# Altium PCB CollisionDetection.PcbDoc
Units mil, origin at the board's own origin, x right, y up, seen from the top; angles counter-clockwise.
Board outline 6000 x 4000 mil, 2 copper layers (Top Layer, Bottom Layer); 16 components, 27 nets, 85 pads, 5 vias.
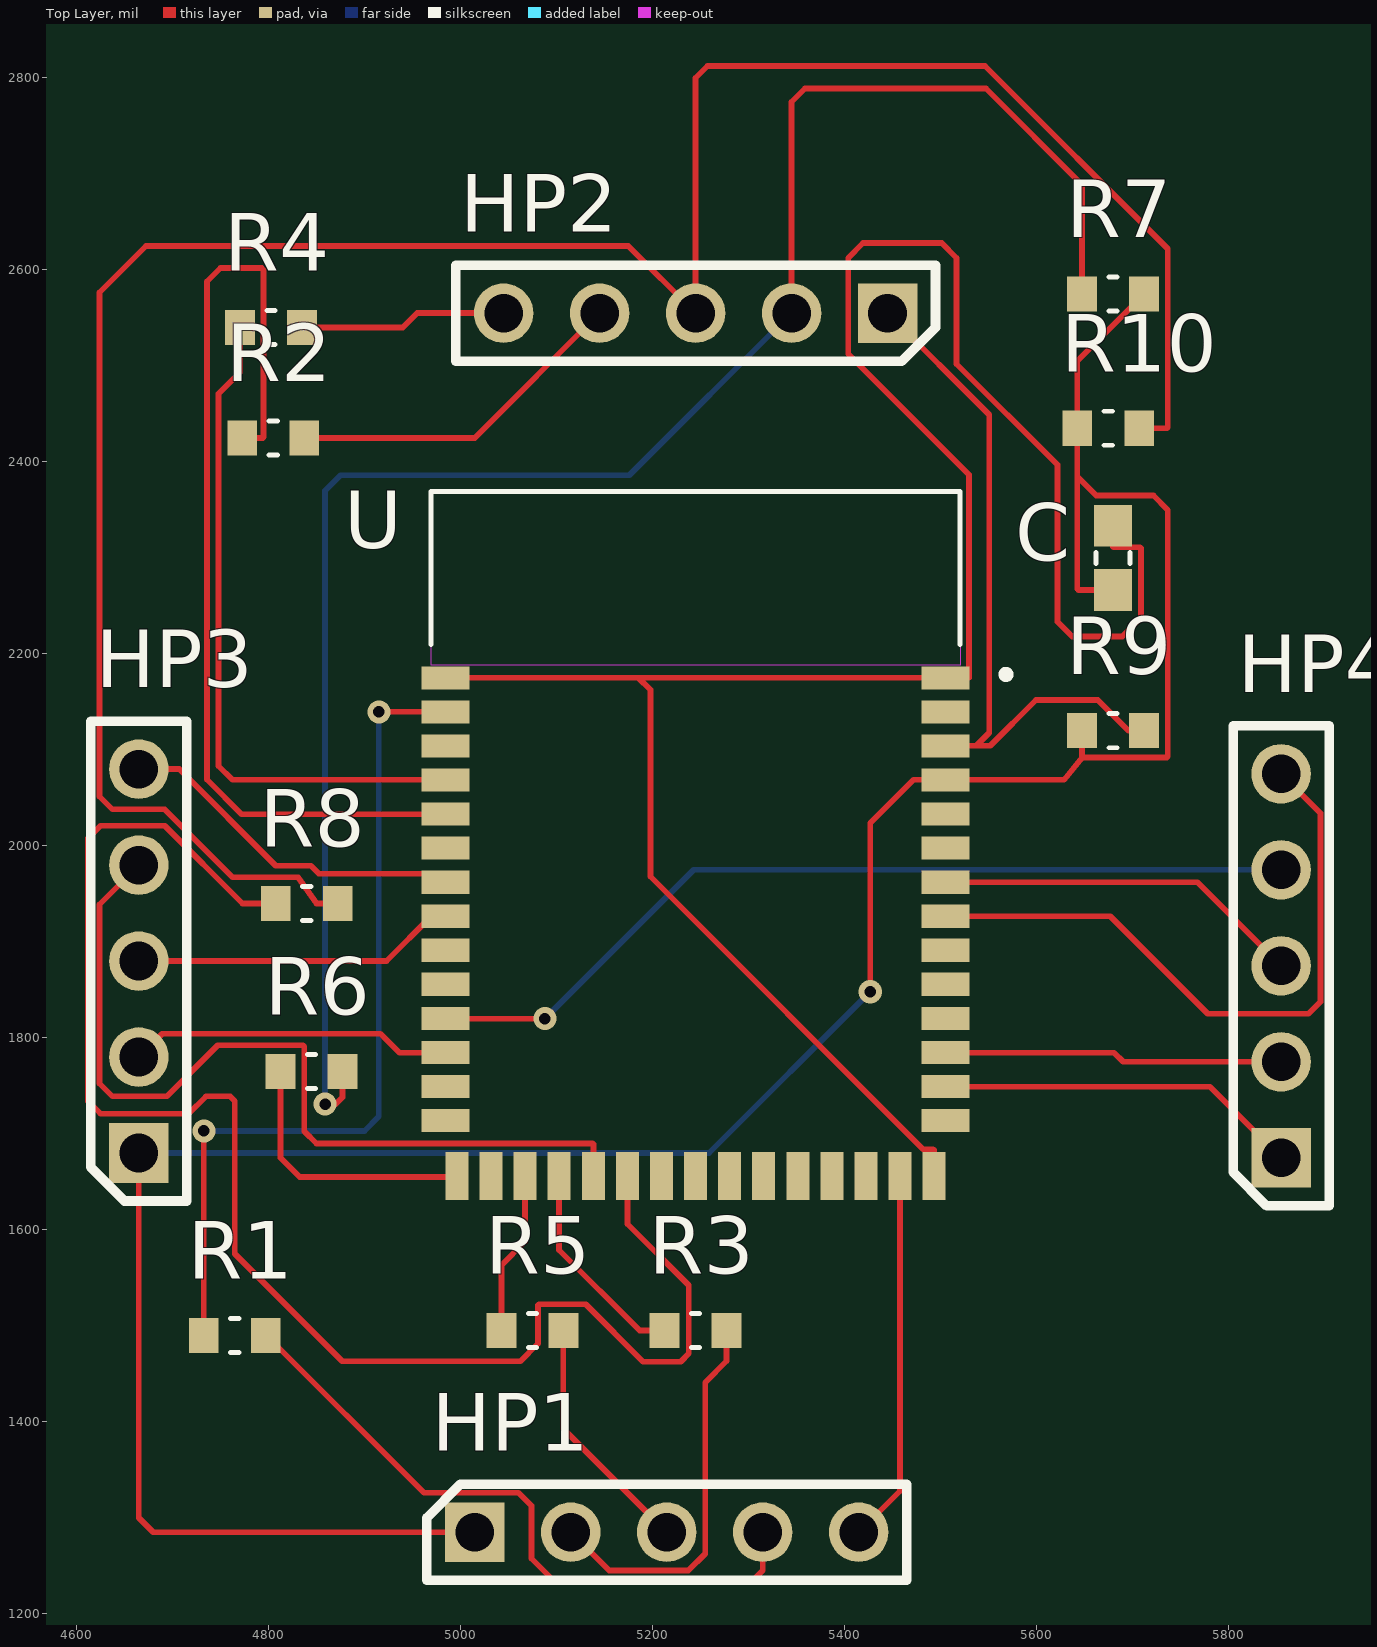
[diagram p0: Top Layer view]
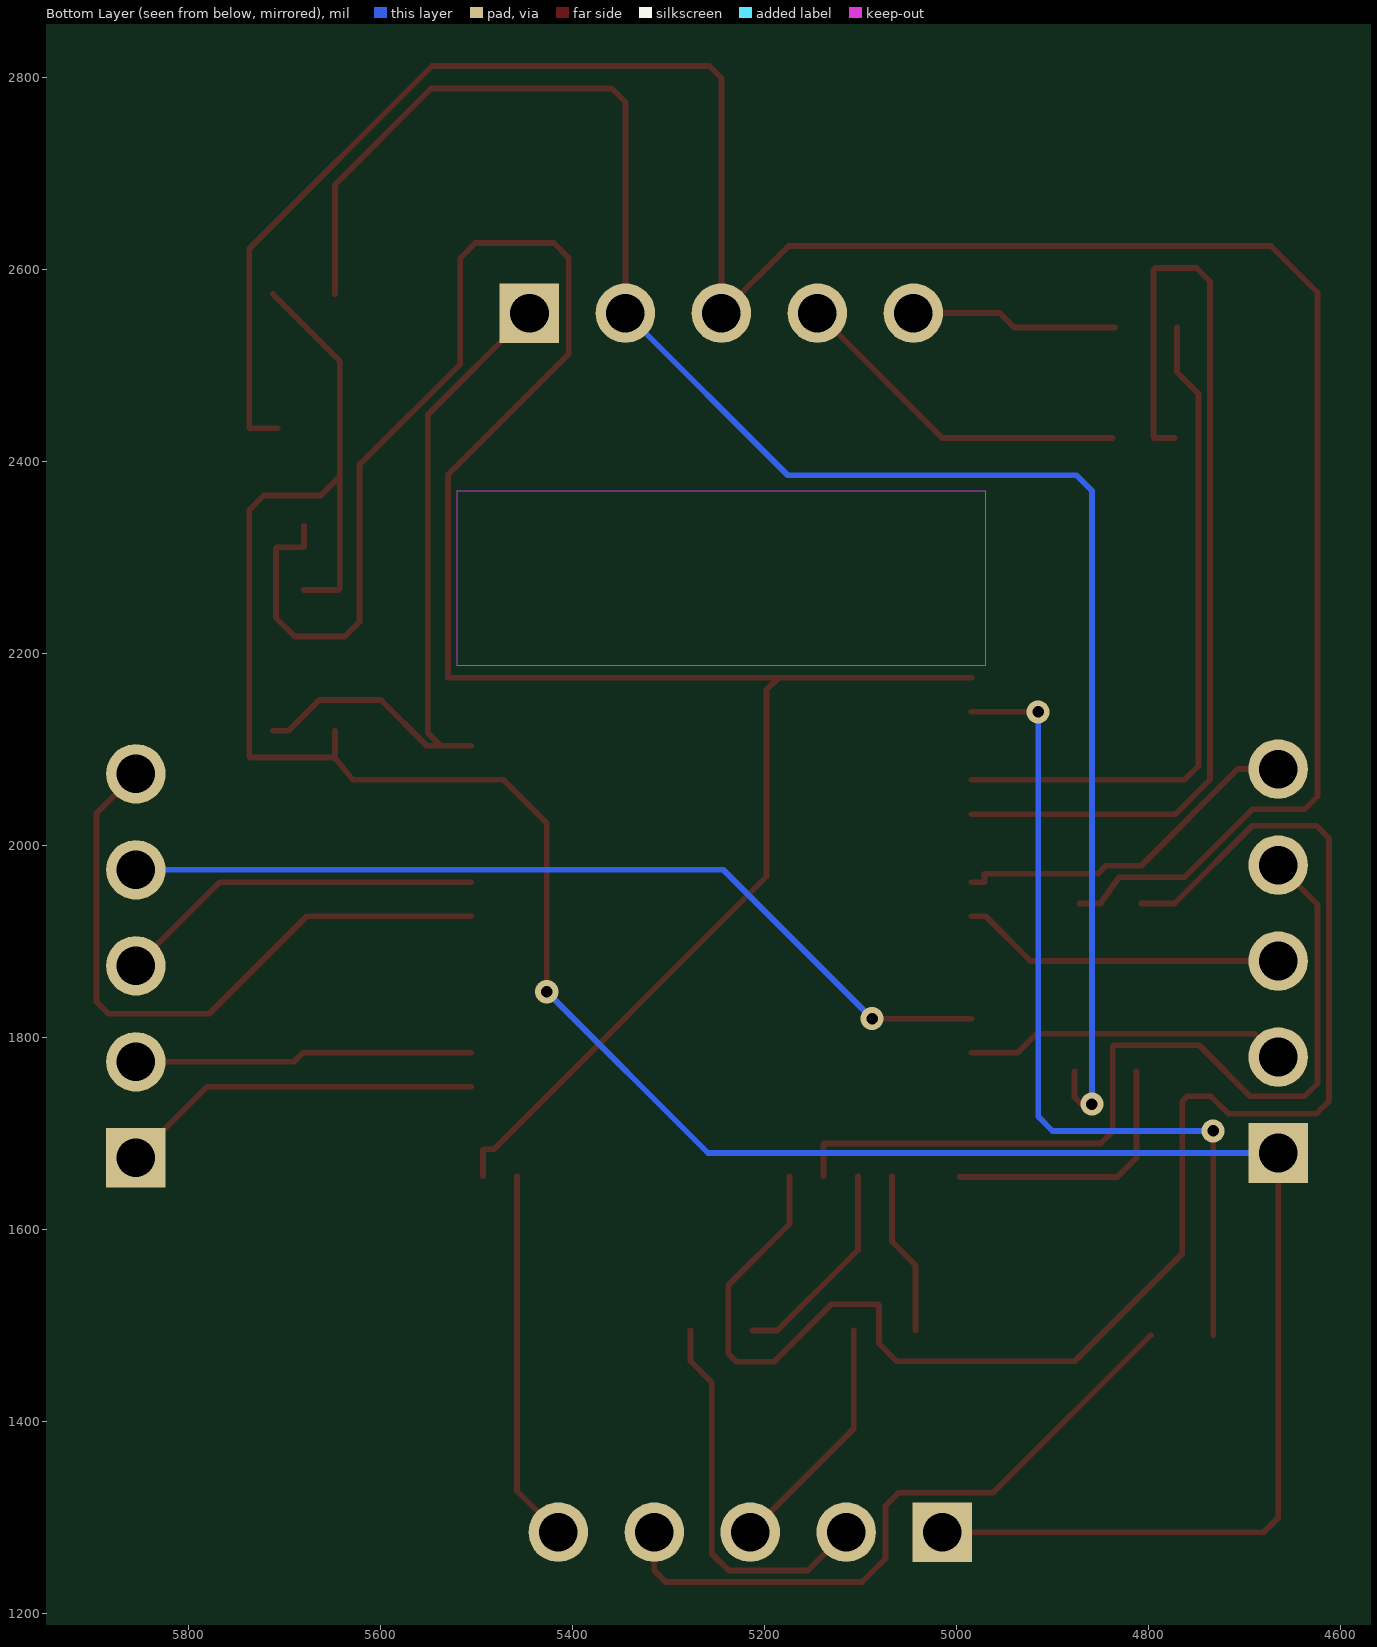
[diagram p1: Bottom Layer view, seen from below]

## Layer stack, top to bottom
Top Solder: solder mask 0.4, Solder Resist, Dk 3.5
Top Layer: signal copper 1.4
Dielectric 1: dielectric 12.6, FR-4, Dk 4.8
Bottom Layer: signal copper 1.4
Bottom Solder: solder mask 0.4, Solder Resist, Dk 3.5

## Board outline
1000,1000 7000,1000 7000,5000 1000,5000

## Design rules (kind name [scope] priority, off if disabled: settings)
BoardOutlineClearance [All] p1: gap=16 ignorepadtopadclearanceinfootprint=FALSE except(0: Arc-SplitContinuation Track-SplitContinuation SMDPad-SplitContinuation THPad-SplitContinuation Via-SplitContinuation Fill-SplitContinuation Poly-SplitContinuation Region-SplitContinuation Text-SplitContinuation)
Clearance [All] p1: gap=6 ignorepadtopadclearanceinfootprint=FALSE
HoleSize [All] p1: absolutevalues=TRUE maxlimit=245 minlimit=12 maxpercent=80.000 minpercent=20.000
MinimumSolderMaskSliver [All] p1 off: minsoldermaskwidth=10
NetAntennae [All] p1 off: netantennaetolerance=0
PolygonConnect [All] p1: connectstyle=Relief reliefconductorwidth=10 reliefentries=4 polygonreliefangle="90 Angle" airgapwidth=10
RoomDefinition CollisionDetection [InComponentClass('CollisionDetection')] p1: confinementstyle=ConfineIn formatcopy=TRUE lockcomponents=FALSE outline 0,0 2000,0 2000,1000 0,1000
RoutingVias [All] p1: holewidth=12 width=24 viastyle="Through Hole" minholewidth=6 minwidth=12 maxholewidth=23.62 maxwidth=47.24
SilkToSilkClearance [All] p1 off: silktosilkclearance=10
SilkToSolderMaskClearance [IsPad] p1 off: minsilkscreentomaskgap=10 clearancetoexposedcopper=TRUE
SolderMaskExpansion [All] p1: expansion=4 istentingtop=FALSE
Width [All] p1: maxlimit=78.74 minlimit=6 preferedwidth=6 minimp=50.000000 maximp=50.000000 favimp=50.000000
25 further rules are at their usual default settings.

## Components (designator, comment, footprint, x,y, rotation, side; value= is the part's Value field where it differs from the comment)
C "10uF" CAPC1608X90 5680,2300 r270 top
HP1 "5HeaderPin" 5HeaderPin 5015,1285 r0 top
HP2 "5HeaderPin" 5HeaderPin 5445,2555 r180 top
HP3 "5HeaderPin" 5HeaderPin 4665,1680 r90 top
HP4 "5HeaderPin" 5HeaderPin 5855,1675 r90 top
R1 "RC0603FR-102ML" RESC1608X55N 4765,1490 r0 top value=0
R2 "RC0603FR-102ML" RESC1608X55N 4805,2425 r0 top value=0
R3 "RC0603FR-102ML" RESC1608X55N 5245,1495 r0 top value=0
R4 "RC0603FR-102ML" RESC1608X55N 4802.72,2540 r0 top value=0
R5 "RC0603FR-102ML" RESC1608X55N 5075,1495 r0 top value=0
R6 "RC0603FR-102ML" RESC1608X55N 4845,1765 r0 top value=0
R7 "RC0603FR-102ML" RESC1608X55N 5680,2575 r0 top value=4.7k
R8 "RC0603FR-102ML" RESC1608X55N 4840,1940 r0 top value=0
R9 "RC0603FR-102ML" RESC1608X55N 5680,2120 r0 top value=0
R10 "RC0603FR-102ML" RESC1608X55N 5675,2435 r180 top value=4.7k
U "CYBLE-416045-02" XCVR_CYBLE-416045-02 5245,2005 r0 top

## Footprints (in the part's own frame and the unit in brackets; to place one, negate y for a bottom-side part, rotate by r counter-clockwise, add the part's x,y. Pads: shape width x height; smd on the part's side, far side on the other; paste and mask are expansions set on the pad)
5HeaderPin [mm]
  rect 1.575x1.575 hole 1.02: 1(0,0)
  round 1.575 hole 1.02: 2(2.54,0) 3(5.08,0) 4(7.62,0) 5(10.16,0)
  silkscreen extent -1.27,-1.27 11.43,1.27, body extent -1.27,-1.24 11.43,1.24, height 17.78
CAPC1608X90 [mm]
  rect 1.1x1 smd: 1(-0.85,0) 2(0.85,0)
  silkscreen extent -0.15,-0.45 0.15,0.45
RESC1608X55N [mm]
  rect 0.79x0.93 smd: 1(-0.82,0) 2(0.82,0)
  silkscreen extent -0.11,-0.45 0.11,0.45
XCVR_CYBLE-416045-02 [mm]
  rect 1.27x0.61 smd: 1(6.62,4.32) 2(6.62,3.42) 3(6.62,2.52) 4(6.62,1.62) 5(6.62,0.71) 6(6.62,-0.19) 7(6.62,-1.09) 8(6.62,-1.99) 9(6.62,-2.89) 10(6.62,-3.79) 11(6.62,-4.7) 12(6.62,-5.6) 13(6.62,-6.5) 14(6.62,-7.4) 30(-6.62,-7.4) 31(-6.62,-6.5) 32(-6.62,-5.6) 33(-6.62,-4.7) 34(-6.62,-3.79) 35(-6.62,-2.89) 36(-6.62,-1.99) 37(-6.62,-1.09) 38(-6.62,-0.19) 39(-6.62,0.71) 40(-6.62,1.62) 41(-6.62,2.52) 42(-6.62,3.42) 43(-6.62,4.32)
  rect 0.61x1.27 smd: 15(6.31,-8.87) 16(5.41,-8.87) 17(4.51,-8.87) 18(3.61,-8.87) 19(2.71,-8.87) 20(1.8,-8.87) 21(0.9,-8.87) 22(0,-8.87) 23(-0.9,-8.87) 24(-1.8,-8.87) 25(-2.7,-8.87) 26(-3.61,-8.87) 27(-4.51,-8.87) 28(-5.41,-8.87) 29(-6.31,-8.87)
  Keep-Out Layer region: 7,4.65 -7,4.65 -7,9.25 7,9.25
  Keep-Out Layer region: 7,4.65 -7,4.65 -7,9.25 7,9.25
  Keep-Out Layer region: 7,4.65 -7,4.65 -7,9.25 7,9.25
  silkscreen extent -7,4.31 8.32,9.25

## Part data
C: library part C0603C104K3RACTU, "0.1ÂµF Â±10% 25V Ceramic Capacitor X7R 0603 _1608 Metric_", Package="0603 Kemet", Digi-Key_Part_Number=399-1281-1-ND, Digi-Key_Purchase_URL=https://www.digikey.com/product-detail/en/kemet/C0603C104K3RACTU/399-1281-1-ND/416057?utm_source=snapeda&utm_medium=aggregator&utm_campaign=symbol, MF=KEMET, MP=C0603C104K3RACTU, SnapEDA_Link=https://www.snapeda.com/parts/C0603C104K3RACTU/KEMET/view-part/78674/?ref=snap
R1 R2 R3 R4 R5 R6 R7 R8 R9 R10: Package=None, Availability=Unavailable, MP=RC0603FR-102ML, Price=None
U: "Bluetooth Bluetooth v5.0 Transceiver Module 2.4GHz ~ 2.5GHz Integrated, Trace Surface Mount", Package="SMD-43 Cypress Semiconductor", Availability=Unavailable, MF="Cypress Semiconductor", MP=CYBLE-416045-02, Price=None, SnapEDA_Link=https://www.snapeda.com/parts/CYBLE-416045-02/Teledyne%20e2v/view-part/3593961/?ref=snap

## Via types
v1: diameter 24, hole 12, Top Layer to Bottom Layer, 5 vias

## Nets (pads, with @x,y where several pads share a name; then routed paths per layer and width w, separated by ;. In a path a pad name is that pad's centre, name@x,y a point inside that pad or via, vN(x,y) a via of type N, cw(c..) or ccw(c..) an arc to the next point about the centre after c; other vN are vias at no path point)
ECHO: HP4.1 U.13 | length 380.1
  Top Layer w6: U.13 5780.91,1749.09 HP4.1
ECHO1: HP4.3 U.7 | length 385.4
  Top Layer w6: U.7 5767.91,1962.09 HP4.3
ECHO2: HP3.2 U.32 | length 337.6
  Top Layer w6: HP3.2 4689.31,1804.31 4916.69,1804.31 4936.47,1784.53 U.32
ECHO3: HP3.4 U.25 | length 914.6
  Top Layer w6: HP3.4 4624,1939 4624,1752.5 4637.5,1739 4694,1739 4747.31,1792.31 4836,1792.31 4837.27,1791.04 4837.27,1702.73 4850,1690 5137.7,1690 5138.7,1689 U.25
GND: C.1 U.1 U.15 U.43 | length 2462.1
  Top Layer w6: U.43 5185.42,2175.08 ; U.15 5493.43,1683 5492.43,1684 5482,1684 5198,1968 5198,2162.5 5185.42,2175.08 ; C.1 5680,2311.5 5680.5,2311 5708,2311 5709,2310 5709,2237.5 5689.5,2218 5637.5,2218 5622,2233.5 5622,2397 5517,2502 5517,2612.5 5501.5,2628 5419.5,2628 5404,2612.5 5404,2512.5 5530,2386.5 5530,2175.08 U.1 5185.42,2175.08
LED: HP4.5 U.8 | length 692.1
  Top Layer w6: U.8 5677,1926.65 5778.65,1825 5883.5,1825 5896,1837.5 5896,2034 HP4.5
P5_0: R2.1 U.39 | length 1044.6
  Top Layer w6: R2.1 4794,2425 4795,2426 4795,2600 4793,2602 4750,2602 4736,2588 4736,2069 4772.05,2032.95 U.39
P5_1: R4.1 U.40 | length 708.4
  Top Layer w6: R4.1 4770.43,2493.43 4748,2471 4748,2083.28 4762.5,2068.78 U.40
P6_4: R8.1 U.24 | length 1642.6
  Top Layer w6: R8.1 4773,1940 4692,2021 4625,2021 4612,2008 4612,1734 4625,1721 4717,1721 4735,1739 4760.3,1739 4765,1734.3 4765,1575 4877,1463 5062.5,1463 5081,1481.5 5081,1521.31 5082,1522.31 5130.53,1522.31 5190.34,1462.5 5229.5,1462.5 5238,1471 5238,1542.13 5174.13,1606 U.24
P6_5: R6.1 U.29 | length 282.9
  Top Layer w6: R6.1 4812.72,1675 4832.72,1655 4996.57,1655 U.29
P6_6: R5.1 U.27 | length 171
  Top Layer w6: R5.1 5042.72,1563 5067.44,1587.72 U.27
P6_7: R3.1 U.26 | length 221.4
  Top Layer w6: U.26 5102.87,1579 5186.87,1495 R3.1
RESET: HP1.4 R1.2 | length 701.4
  Top Layer w6: R1.2 4798,1490 4962,1326 5060.5,1326 5074,1312.5 5074,1257.5 5098.5,1233 5303,1233 5315,1245 HP1.4
RX: HP2.4 R2.2 | length 361.6
  Top Layer w6: R2.2 5015,2425 HP2.4
SCL: HP2.3 R8.2 R10.1 | length 2529.7
  Top Layer w6: R8.2 4850,1940 4831,1967.31 4762.69,1967.31 4692,2038 4637.5,2038 4624,2051.5 4624,2576.5 4672.5,2625 5175,2625 HP2.3 5245,2800 5257.5,2812.5 5546.5,2812.5 5737,2622 5737,2436 5736,2435 R10.1
SDA: HP2.2 R6.2 R7.1 | length 1933.6
  Top Layer w6: v1(4859,1731) 4870.28,1731 4877.28,1738 R6.2 ; HP2.2 5345,2775 5359,2789 5547.5,2789 5647.72,2688.78 R7.1
  Bottom Layer w6: v1(4859,1731) 4859,2370 4875,2386 5176,2386 HP2.2
SWDCLK: HP1.2 R3.2 | length 405.6
  Top Layer w6: HP1.2 5155,1245 5237.5,1245 5255,1262.5 5255,1441 5277.28,1463.28 R3.2
SWDIO: HP1.3 R5.2 | length 254.6
  Top Layer w6: R5.2 5107.28,1392.72 HP1.3
TRIGGER: HP4.2 U.12 | length 353.3
  Top Layer w6: U.12 5681,1784.53 5690.53,1775 HP4.2
TRIGGER1: HP4.4 U.33 | length 934.8
  Top Layer w6: U.33 v1(5088,1819.96)
  Bottom Layer w6: v1(5088,1819.96) 5243.04,1975 HP4.4
TRIGGER2: HP3.3 U.36 | length 338.7
  Top Layer w6: HP3.3 4923,1880 4969.65,1926.65 U.36
TRIGGER3: HP3.5 U.37 | length 373.4
  Top Layer w6: HP3.5 4707.04,2080 4807.73,1979.31 4844.27,1979.31 4852.58,1971 4971,1971 4971,1962.09 U.37
TX: HP2.5 R4.2 | length 216.2
  Top Layer w6: R4.2 4940,2540 4955,2555 HP2.5
VBACKUP: HP2.1 R9.2 U.3 | length 740
  Top Layer w6: HP2.1 5551,2449 5551,2117.71 5537.5,2104.21 ; U.3 5537.5,2104.21 ; R9.2 5696,2120 5664,2152 5599.79,2152 5552,2104.21 5537.5,2104.21
VBUCK: C.2 HP1.1 HP3.1 R7.2 R9.1 R10.2 U.4 | length 2851.2
  Top Layer w6: HP3.1 4665,1300 4680,1285 HP1.1 ; v1(5427,1848) 5427,2023.78 5472,2068.78 U.4 5629,2068.78 5647.72,2092 ; R9.1 5647.72,2093 5647.72,2092 ; C.2 5644,2266.54 5642.72,2267.82 5642.72,2384.78 ; R7.2 5712.28,2574.57 5642.72,2505 R10.2 5642.72,2384.78 ; 5642.72,2384.78 5662.5,2365 5722,2365 5737,2350 5737,2093 5736,2092 5647.72,2092
  Bottom Layer w6: HP3.1 5259,1680 v1(5427,1848)
VREF: HP1.5 U.16 | length 388.6
  Top Layer w6: HP1.5 5457.99,1327.99 U.16
XRES: R1.1 U.42 | length 892.5
  Top Layer w6: R1.1 v1(4732.72,1703) ; v1(4915,2139.65) U.42
  Bottom Layer w6: v1(4732.72,1703) 4900,1703 4915,1718 v1(4915,2139.65)
pads on no net: U.2 U.5 U.6 U.9 U.10 U.11 U.14 U.17 U.18 U.19 U.20 U.21 U.22 U.23 U.28 U.30 U.31 U.34 U.35 U.38 U.41